# EAGLE board LCDmainout2 (EAGLE 7.4.0)
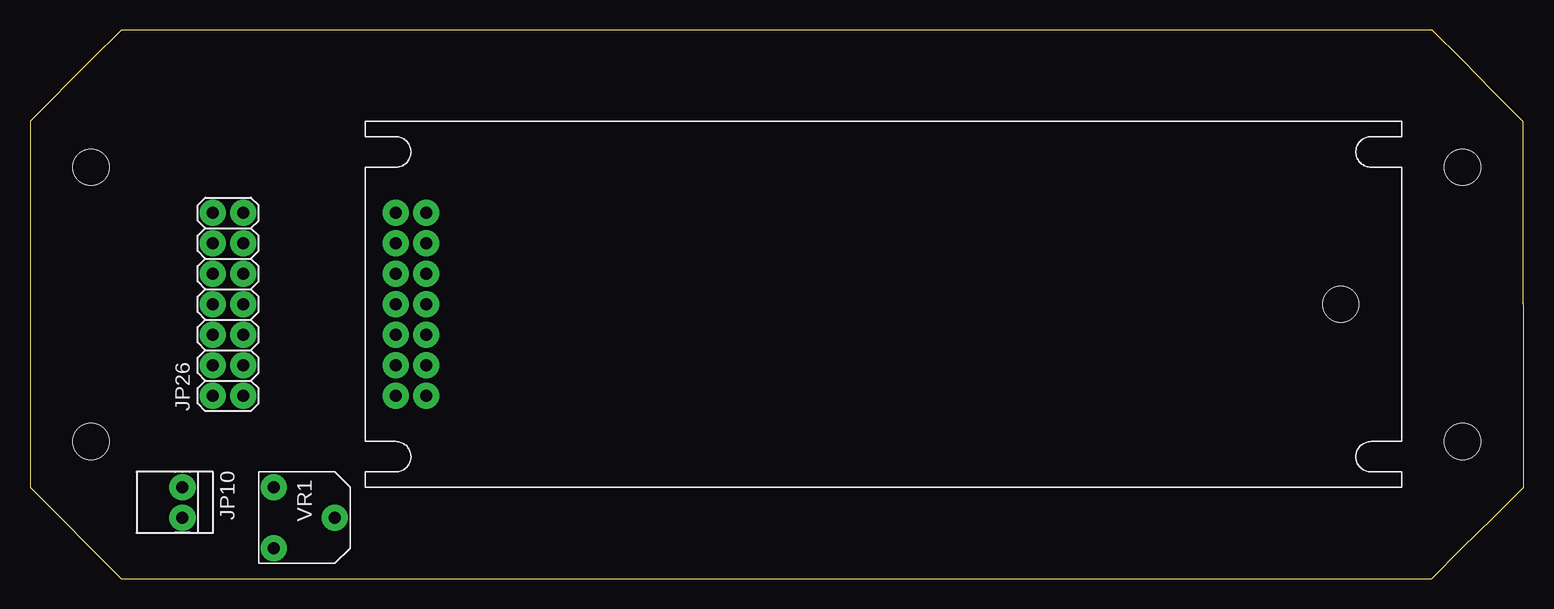
[diagram p0: board, top side]
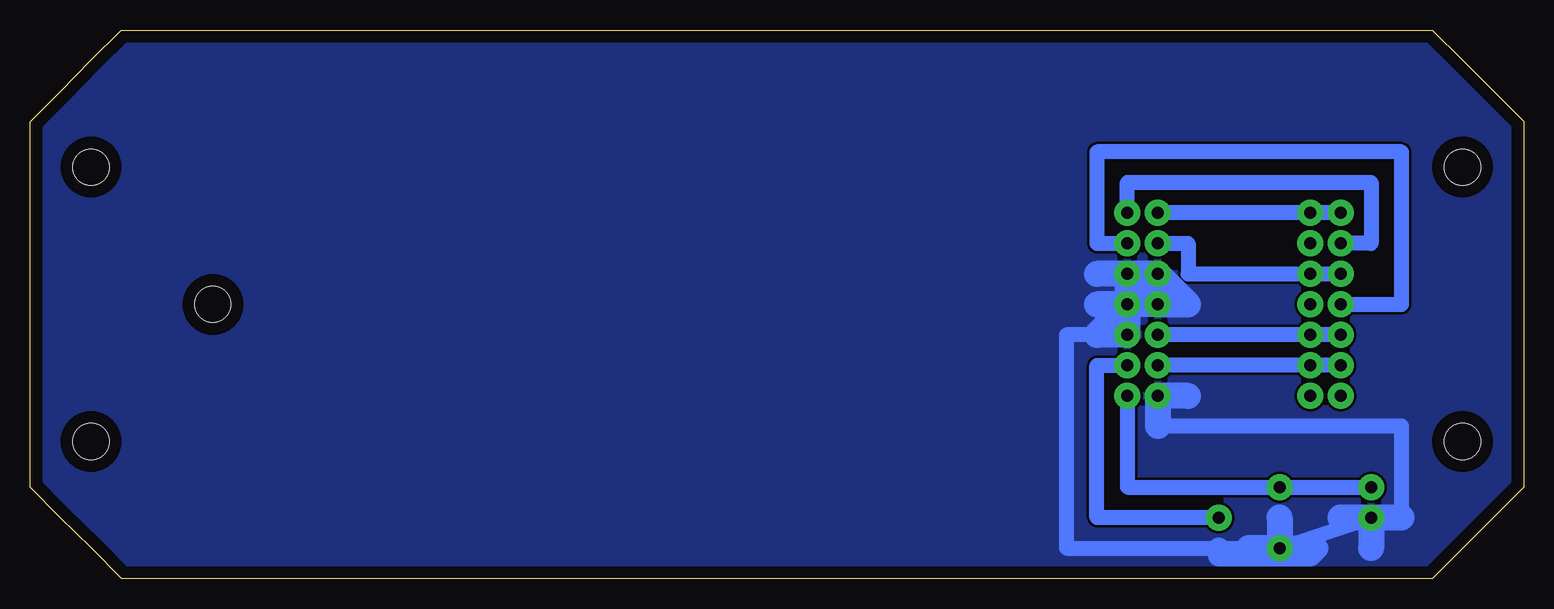
[diagram p1: board, bottom side, seen from below]

Size 124.46 x 45.72 mm. Coordinates in mm from the lower left corner, seen from the top.
Outline: 7.62,0 116.82,0 119.36,2.56 121.92,5.08 124.46,7.62 124.44,38.09 121.91,40.63 119.38,43.18 116.84,45.72 7.62,45.71 5.08,43.18 0,38.1 0,7.62 7.62,0
Copper layers (1*16): Top 0.035mm / dielectric 1.5mm / Bottom 0.035mm
Design rules "default": minimum track width 10mil, minimum drill 24mil, track to track 8mil, track to pad 8mil, pad to pad 8mil, via to via 8mil, smd to smd 8mil, copper to edge 40mil, drill to drill 8mil, minimum pad ring 10mil, minimum via ring 8mil, stop-mask expansion 4mil, vias tented up to drill 0mil, thermal gap 10mil
Holes 3 mm at 5.08,34.29 5.08,11.43 119.38,34.29 119.38,11.43 109.22,22.86

## Footprints (pad centres in the part's own frame; a part is rotated, then mirrored left to right if it is on the bottom)
1*02 = drill 1 pad 2.184: 1 -1.27,0; 2 1.27,0
2X07 = drill 1 pad 2.184: 1 -7.62,-1.27; 2 -7.62,1.27; 3 -5.08,-1.27; 4 -5.08,1.27; 5 -2.54,-1.27; 6 -2.54,1.27; 7 0,-1.27; 8 0,1.27; 9 2.54,-1.27; 10 2.54,1.27; 11 5.08,-1.27; 12 5.08,1.27; 13 7.62,-1.27; 14 7.62,1.27
LCD_16X2 = drill 1 pad 2.184: P$1 5.08,7.62; P$2 2.54,7.62; P$3 5.08,10.16; P$4 2.54,10.16; P$5 5.08,12.7; P$6 2.54,12.7; P$7 5.08,15.24; P$8 2.54,15.24; P$9 5.08,17.78; P$10 2.54,17.78; P$11 5.08,20.32; P$12 2.54,20.32; P$13 5.08,22.86; P$14 2.54,22.86
R_TRIM3 = drill 1 pad 2.184: 1 -2.54,-2.54; 2 0,2.54; 3 2.54,-2.54

## Placement (x,y rotation side)
JP10  [1*02]  12.7,6.35 270 top
JP26  [2X07]  16.51,22.86 90 top
U$1  LCD_16X2  [LCD_16X2]  27.94,7.62 0 top
VR1  [R_TRIM3]  22.86,5.08 270 top

## Library data of the parts
JP10 JP26 = pinhead_s
U$1 = LCD_s
VR1 = rcl__s

## Nets
+5V: JP10.1 U$1.P$1 VR1.1
DB4: JP26.8 U$1.P$11
DB5: JP26.10 U$1.P$12
DB6: JP26.12 U$1.P$13
DB7: JP26.14 U$1.P$14
E: JP26.6 U$1.P$6
GND: JP10.2 U$1.P$2 U$1.P$5 U$1.P$7 U$1.P$8 U$1.P$9 U$1.P$10 VR1.3
N$2: U$1.P$3 VR1.2
RS: JP26.4 U$1.P$4

## Tracks (layer width: path | path; a pad name or v marks a point on that pad's centre or on a via)
+5V
  Bottom 1.27: U$1.P$1 33.02,7.62 VR1.1 JP10.1
DB4
  Bottom 1.27: JP26.8 10.16,22.86 10.16,35.56 35.56,35.56 35.56,27.94 U$1.P$11
DB5
  Bottom 1.27: U$1.P$12 27.94,27.94 27.94,25.4 JP26.10
DB6
  Bottom 1.27: U$1.P$13 33.02,33.02 12.7,33.02 12.7,27.94 JP26.12
DB7
  Bottom 1.27: JP26.14 U$1.P$14
E
  Bottom 1.27: JP26.6 U$1.P$6
GND
  Bottom 1.27: VR1.3 JP10.2 | 10.16,5.08 10.16,12.7 30.48,12.7 | 35.56,20.32 38.1,20.32 38.1,2.54 25.4,2.54 22.86,2.54 | U$1.P$5 U$1.P$7 U$1.P$9
  Bottom 1.778: 25.4,2.54 25.4,1.9 17.78,1.9 17.14,2.54
  Bottom 2.184: U$1.P$10 U$1.P$9 | U$1.P$9 35.56,25.4 | U$1.P$10 U$1.P$8 | U$1.P$9 U$1.P$5 35.56,20.32 U$1.P$10 | U$1.P$8 35.56,22.86 | U$1.P$8 27.94,22.86 U$1.P$10 | 27.94,15.24 U$1.P$2 30.48,12.7 | 10.16,5.08 JP10.2 | JP10.2 15.24,5.08 | JP10.2 12.7,2.54 | VR1.3 22.86,2.54 | VR1.3 17.78,2.54 | 20.32,5.08 VR1.3
  pour Bottom: 7.62,45.09 0.63,38.1 0.63,7.62 7.62,0.63 116.84,0.63 123.82,7.62 123.82,38.1 116.84,45.09
N$2
  Bottom 1.27: VR1.2 35.56,5.08 35.56,17.78 U$1.P$3
RS
  Bottom 1.27: JP26.4 U$1.P$4